# Altium PCB Layout.PcbDoc
Units mm, origin at the board's own origin, x right, y up, seen from the top; angles counter-clockwise.
Board outline 100 x 100 mm, 4 copper layers (Top Layer, Ground Layer, Power Layer, Bottom Layer), stack 1.591 mm thick; 122 components, 67 nets, 405 pads, 0 vias.
Unrouted connection lines stored in the file: 308.
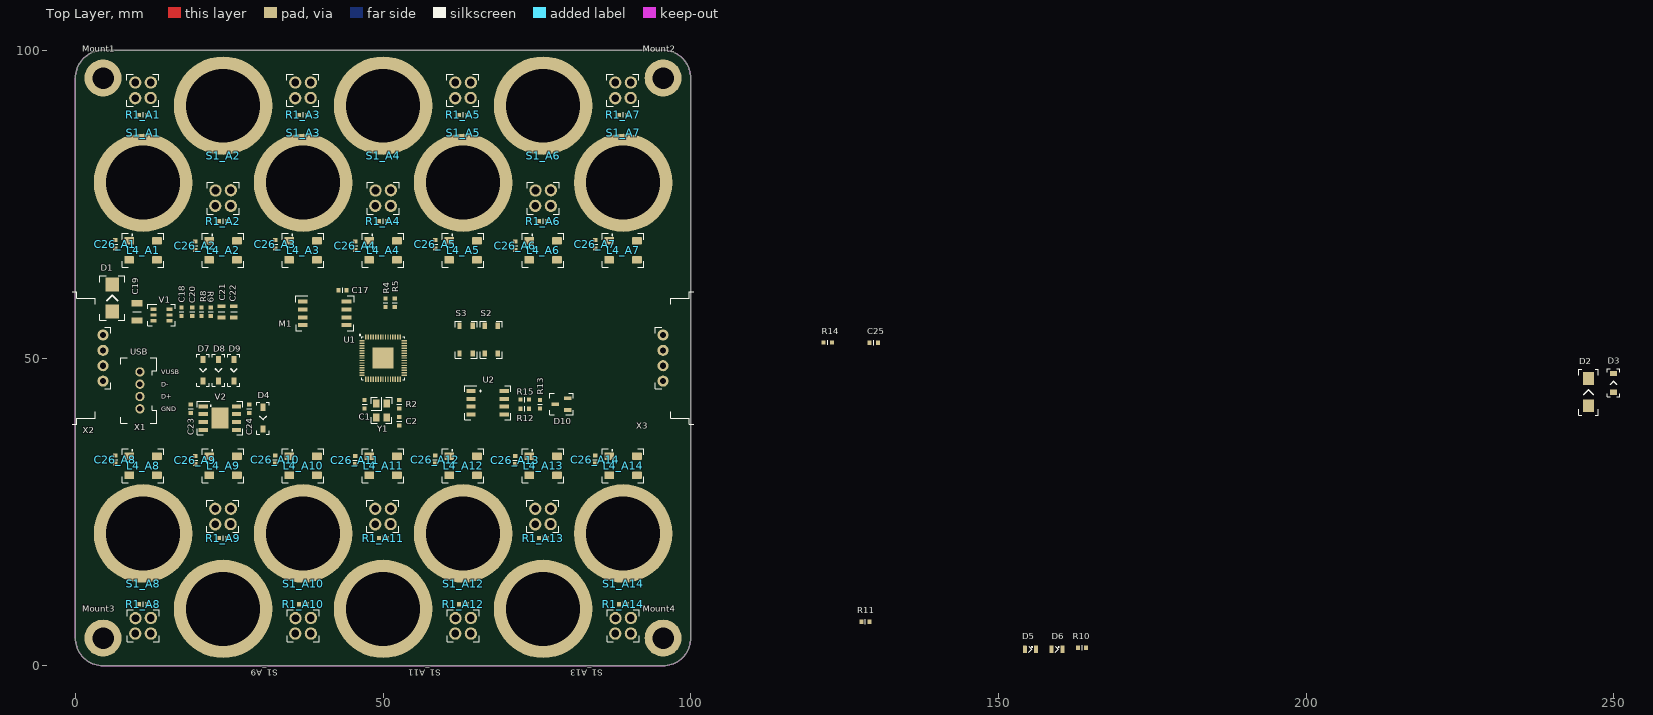
[diagram p0: Top Layer view]
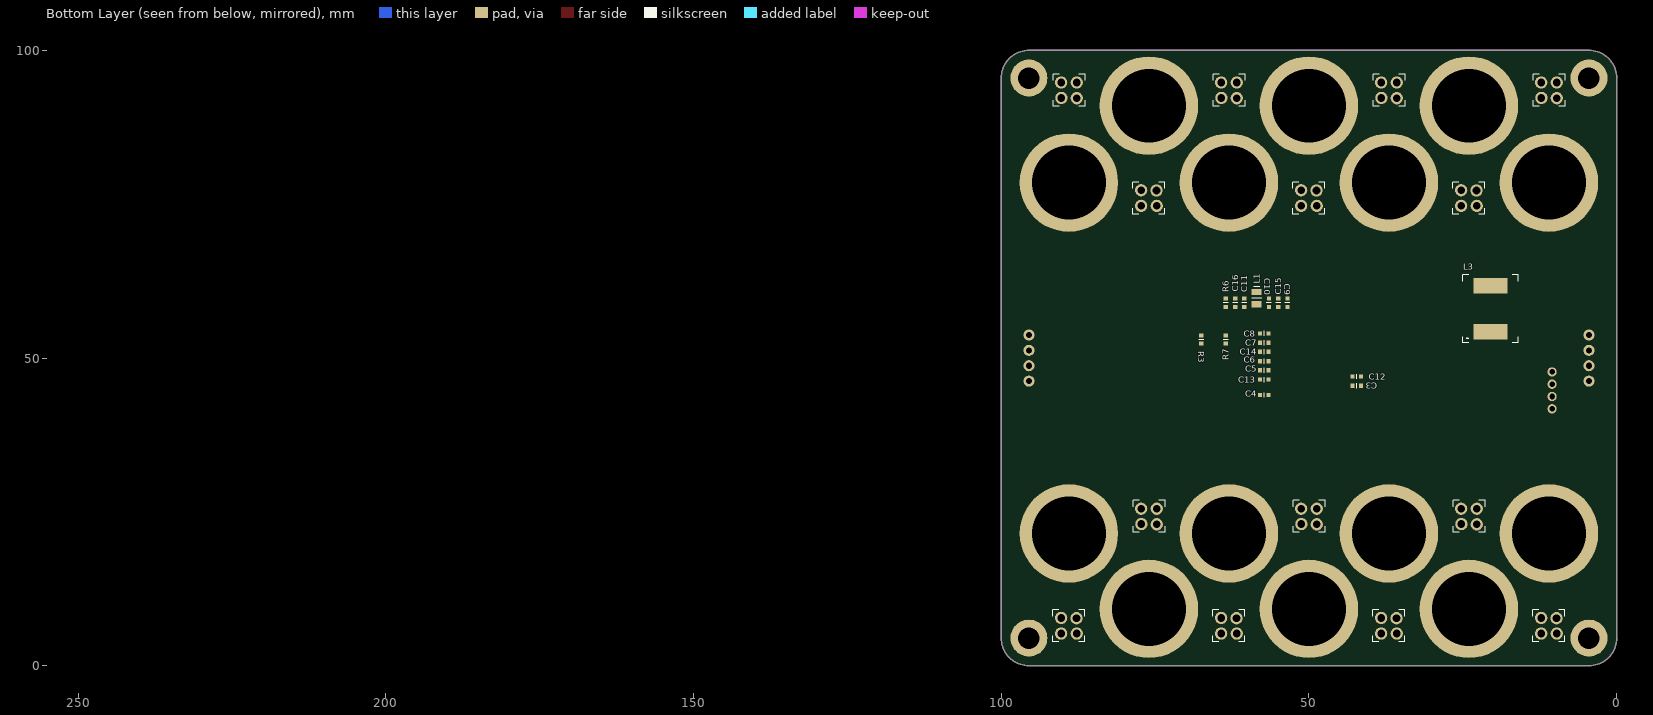
[diagram p1: Bottom Layer view, seen from below]

## Layer stack, top to bottom
Top Solder: solder mask 0.0102, Solder Resist, Dk 3.8
Top Layer: signal copper 0.035
Dielectric 2: prepreg 0.2104, 7628*1, Dk 4.4
Ground Layer: signal copper 0.0175
Dielectric 1: dielectric 1.065, FR-4, Dk 4.8
Power Layer: signal copper 0.0175
Dielectric 3: prepreg 0.2104, 7628*1, Dk 4.4
Bottom Layer: signal copper 0.035
Bottom Solder: solder mask 0.0102, Solder Resist, Dk 3.8

## Board outline
0,4.5 0,95.5 cw(c4.5,95.5) 4.5,100 95.5,100 cw(c95.5,95.5) 100,95.5 100,4.5 cw(c95.5,4.5) 95.5,0 4.5,0 cw(c4.5,4.5)

## Design rules (kind name [scope] priority, off if disabled: settings)
BoardOutlineClearance [All] p1: gap=0.2 ignorepadtopadclearanceinfootprint=FALSE
Clearance "inPolygon Clearance" [InPolygon] p1: gap=0.3 ignorepadtopadclearanceinfootprint=TRUE // this rule ensures that every net within a polygon of a different net has a set clearance from the poly
Clearance "High Current Polygon Clearance" [(InPolygon AND InNetClass('High_Current_Nets'))] p2: gap=0 ignorepadtopadclearanceinfootprint=TRUE // this rule ensures that every net within a polygon of a different net has a set clearance from the poly
Clearance "Different Diff Pair" [All] p3: gap=0.2 ignorepadtopadclearanceinfootprint=TRUE
Clearance "Same Diff Pair" [All] p4: gap=0.1 ignorepadtopadclearanceinfootprint=TRUE
Clearance "Different Nets" [not InAnyDifferentialPair] p5: gap=0.3 ignorepadtopadclearanceinfootprint=TRUE except(0.1: Arc-SMDPad Arc-THPad Arc-Via Arc-Text Track-SMDPad Track-THPad Track-Via Track-Text SMDPad-Text THPad-Text Via-Text Fill-Text Poly-Text Region-Text Text-Text; 0.12: Arc-Arc Arc-Track Track-Track; 0.15: SMDPad-SMDPad SMDPad-THPad SMDPad-Via THPad-THPad THPad-Via Via-Via; 0.2: Arc-Hole Track-Hole SMDPad-Hole THPad-Hole Via-Hole Fill-Hole Poly-Hole Region-Hole Text-Hole)
Clearance "Same Net" [not InAnyDifferentialPair] p6: gap=0 ignorepadtopadclearanceinfootprint=TRUE except(0.1: THPad-Via; 0.18: Arc-Arc Arc-Track Track-Track)
ComponentClearance [All] p1: gap=0.102 collisioncheckmode=3 verticalgap=0.102 showdistances=TRUE
DiffPairsRouting "Ethernet Routing" [InDifferentialPairClass('Ethernet_Pairs')] p1: maxlimit=0.25 minlimit=0.2 mostfreqgap=0.25 toplayer_maxgap=0.2 toplayer_prefgap=0.2 toplayer_minwidth=0.25 toplayer_maxwidth=0.25 toplayer_prefwidth=0.25 midlayer1_mingap=0.25 midlayer1_minwidth=0.19 midlayer1_maxwidth=0.19 midlayer1_prefwidth=0.19 midlayer2_mingap=0.25 midlayer2_minwidth=0.19 midlayer2_maxwidth=0.19 midlayer2_prefwidth=0.19 bottomlayer_maxgap=0.2 bottomlayer_prefgap=0.2 bottomlayer_minwidth=0.25 bottomlayer_maxwidth=0.25 bottomlayer_prefwidth=0.25 impedanceprofiledriven=TRUE maxuncoupledlength=12.7
DiffPairsRouting "USB Routing" [InDifferentialPairClass('USB_Pairs')] p2: maxlimit=0.291 minlimit=0.127 mostfreqgap=0.291 toplayer_maxgap=0.127 toplayer_prefgap=0.127 toplayer_minwidth=0.23 toplayer_maxwidth=0.23 toplayer_prefwidth=0.23 midlayer1_mingap=0.291 midlayer1_minwidth=0.25 midlayer1_maxwidth=0.25 midlayer1_prefwidth=0.25 midlayer2_mingap=0.291 midlayer2_minwidth=0.25 midlayer2_maxwidth=0.25 midlayer2_prefwidth=0.25 bottomlayer_maxgap=0.127 bottomlayer_prefgap=0.127 bottomlayer_minwidth=0.23 bottomlayer_maxwidth=0.23 bottomlayer_prefwidth=0.23 maxuncoupledlength=12.7
DiffPairsRouting "CAN Routing" [InDifferentialPairClass('CAN_Pairs')] p3: maxlimit=0.907 minlimit=0.5 mostfreqgap=0.907 toplayer_maxgap=0.5 toplayer_prefgap=0.5 toplayer_minwidth=0.201 toplayer_maxwidth=0.201 toplayer_prefwidth=0.201 midlayer1_mingap=0.907 midlayer1_minwidth=0.155 midlayer1_maxwidth=0.155 midlayer1_prefwidth=0.155 midlayer2_mingap=0.907 midlayer2_minwidth=0.155 midlayer2_maxwidth=0.155 midlayer2_prefwidth=0.155 bottomlayer_maxgap=0.5 bottomlayer_prefgap=0.5 bottomlayer_minwidth=0.201 bottomlayer_maxwidth=0.201 bottomlayer_prefwidth=0.201 maxuncoupledlength=12.7
DiffPairsRouting "RS485 Routing" [InDifferentialPairClass('RS485_Pairs')] p4: maxlimit=1.376 minlimit=0.127 mostfreqgap=1.376 toplayer_maxgap=0.127 toplayer_prefgap=0.127 toplayer_minwidth=0.1 toplayer_maxwidth=0.1 toplayer_prefwidth=0.1 midlayer1_mingap=1.376 midlayer1_minwidth=0.1 midlayer1_maxwidth=0.1 midlayer1_prefwidth=0.1 midlayer2_mingap=1.376 midlayer2_minwidth=0.1 midlayer2_maxwidth=0.1 midlayer2_prefwidth=0.1 bottomlayer_maxgap=0.127 bottomlayer_prefgap=0.127 bottomlayer_minwidth=0.1 bottomlayer_maxwidth=0.1 bottomlayer_prefwidth=0.1 impedanceprofiledriven=TRUE impedanceprofileid={28283980-AAE0-49A4-94E4-57724D17D13D} impedanceprofilevalue=120.000000 maxuncoupledlength=12.7
Height [All] p1: minheight=0 maxheight=1816.048 prefheight=12.7
HoleSize [All] p1: absolutevalues=TRUE maxlimit=6.3 minlimit=0.3 maxpercent=80.000 minpercent=20.000
HoleToHoleClearance [All] p1: gap=0.25 allowstackedmicrovias=FALSE
MatchedLengths "XTAL Nets Matched Delays" [InNetClass('XTAL_Nets')] p1: tolerance=25.4 checknetsindiffpair=FALSE checkdiffpairvsdiffpair=TRUE checkxsignals=TRUE checkothers=TRUE usedelayunits=TRUE delaytolerance=10.000000
MatchedLengths "Diff Pair Matched Delays" [InDifferentialPairClass('Ethernet_Pairs') or InDifferentialPairClass('USB_Pairs') or InDifferentialPairClass('CAN_Pairs')] p2: tolerance=5 checknetsindiffpair=TRUE checkdiffpairvsdiffpair=FALSE checkxsignals=FALSE checkothers=FALSE usedelayunits=TRUE delaytolerance=100.000000 phasematching=TRUE phasedelaytolerance=5.000000 phasedistance=12.7
MinimumAnnularRing [All] p1: minimumring=0.2
MinimumSolderMaskSliver [All] p1: minsoldermaskwidth=0
PlaneClearance "Supply Net Clearance" [InNetClass('Supply_Nets')] p1: clearance=0.5
PlaneClearance "All Nets" [All] p2: clearance=0.3
PolygonConnect "High Current" [InNetClass('High_Current_Nets')] p1: thpad.connectstyle=Relief thpad.reliefconductorwidth=0.4 thpad.reliefentries=4 thpad.polygonreliefangle="90 Angle" thpad.airgapwidth=0.1 thpad.conductorbypadedge=TRUE thpad.mindistance=0.381 thpad.enablemindistance=FALSE smdpad.connectstyle=Direct smdpad.reliefconductorwidth=0.254 smdpad.reliefentries=4 smdpad.polygonreliefangle="90 Angle" smdpad.airgapwidth=0.254 via.connectstyle=Direct via.reliefconductorwidth=0.254 via.reliefentries=4 via.polygonreliefangle="90 Angle" via.airgapwidth=0.254
PolygonConnect "Supply Nets" [InNetClass('Supply_Nets') OR InNetClass('Supply_Net')] p2: connectstyle=Relief reliefconductorwidth=0.3 reliefentries=4 polygonreliefangle="90 Angle" conductorbypadedge=TRUE mindistance=0.381 enablemindistance=FALSE airgapwidth=0.254
PolygonConnect General [All] p3: connectstyle=Relief reliefconductorwidth=0.254 reliefentries=4 polygonreliefangle="90 Angle" airgapwidth=0.254
RoomDefinition A11 [InComponentClass('A11')] p1: confinementstyle=ConfineIn formatcopy=TRUE lockcomponents=FALSE outline 40.848,0.098 40.848,30.403 44.748,30.403 44.748,34.802 46.398,34.802 46.398,35.452 53.602,35.452 53.602,30.403 59.152,30.403 59.152,0.098
RoomDefinition A9 [InComponentClass('A9')] p2: confinementstyle=ConfineIn formatcopy=TRUE lockcomponents=FALSE outline 14.848,0.098 14.848,30.403 18.748,30.403 18.748,34.802 20.398,34.802 20.398,35.452 27.602,35.452 27.602,30.403 33.152,30.403 33.152,0.098
RoomDefinition A10 [InComponentClass('A10')] p3: confinementstyle=ConfineIn formatcopy=TRUE lockcomponents=FALSE outline 27.848,0.347 27.848,30.652 31.748,30.652 31.748,34.877 33.398,34.877 33.398,35.452 40.602,35.452 40.602,30.652 46.152,30.652 46.152,0.347
RoomDefinition A14 [InComponentClass('A14')] p4: confinementstyle=ConfineIn formatcopy=TRUE lockcomponents=FALSE outline 79.848,0.347 79.848,30.652 83.748,30.652 83.748,34.877 85.398,34.877 85.398,35.452 92.602,35.452 92.602,30.652 98.152,30.652 98.152,0.347
RoomDefinition A13 [InComponentClass('A13')] p5: confinementstyle=ConfineIn formatcopy=TRUE lockcomponents=FALSE outline 66.848,0.098 66.848,30.403 70.748,30.403 70.748,34.802 72.398,34.802 72.398,35.452 79.602,35.452 79.602,30.403 85.152,30.403 85.152,0.098
RoomDefinition A12 [InComponentClass('A12')] p6: confinementstyle=ConfineIn formatcopy=TRUE lockcomponents=FALSE outline 53.848,0.347 53.848,30.652 57.748,30.652 57.748,34.877 59.398,34.877 59.398,35.452 66.602,35.452 66.602,30.652 72.152,30.652 72.152,0.347
RoomDefinition A8 [InComponentClass('A8')] p7: confinementstyle=ConfineIn formatcopy=TRUE lockcomponents=FALSE outline 1.848,0.347 1.848,30.652 5.748,30.652 5.748,34.877 7.398,34.877 7.398,35.452 14.602,35.452 14.602,30.652 20.152,30.652 20.152,0.347
RoomDefinition A7 [InComponentClass('A7')] p8: confinementstyle=ConfineIn formatcopy=TRUE lockcomponents=FALSE outline 79.848,69.348 79.848,99.653 98.152,99.653 98.152,69.348 92.602,69.348 92.602,64.548 85.398,64.548 85.398,67.123 83.748,67.123 83.748,69.348
RoomDefinition A6 [InComponentClass('A6')] p9: confinementstyle=ConfineIn formatcopy=TRUE lockcomponents=FALSE outline 66.848,69.847 66.848,100.152 85.152,100.152 85.152,69.847 79.602,69.847 79.602,64.548 72.398,64.548 72.398,66.873 70.748,66.873 70.748,69.847
RoomDefinition A5 [InComponentClass('A5')] p10: confinementstyle=ConfineIn formatcopy=TRUE lockcomponents=FALSE outline 53.848,69.348 53.848,99.653 72.152,99.653 72.152,69.348 66.602,69.348 66.602,64.548 59.398,64.548 59.398,67.123 57.748,67.123 57.748,69.348
RoomDefinition A4 [InComponentClass('A4')] p11: confinementstyle=ConfineIn formatcopy=TRUE lockcomponents=FALSE outline 40.848,69.847 40.848,100.152 59.152,100.152 59.152,69.847 53.602,69.847 53.602,64.548 46.398,64.548 46.398,66.873 44.748,66.873 44.748,69.847
RoomDefinition A3 [InComponentClass('A3')] p12: confinementstyle=ConfineIn formatcopy=TRUE lockcomponents=FALSE outline 27.848,69.348 27.848,99.653 46.152,99.653 46.152,69.348 40.602,69.348 40.602,64.548 33.398,64.548 33.398,67.123 31.748,67.123 31.748,69.348
RoomDefinition A2 [InComponentClass('A2')] p13: confinementstyle=ConfineIn formatcopy=TRUE lockcomponents=FALSE outline 14.848,69.847 14.848,100.152 33.152,100.152 33.152,69.847 27.602,69.847 27.602,64.548 20.398,64.548 20.398,66.873 18.748,66.873 18.748,69.847
RoomDefinition A1 [InComponentClass('A1')] p14: confinementstyle=ConfineIn formatcopy=TRUE lockcomponents=FALSE outline 1.848,69.348 1.848,99.653 20.152,99.653 20.152,69.348 14.602,69.348 14.602,64.548 7.398,64.548 7.398,67.123 5.748,67.123 5.748,69.348
RoutingVias [All] p1: holewidth=0.2 width=0.35 viastyle="Through Hole" minholewidth=0.15 minwidth=0.3 maxholewidth=6.3 maxwidth=6.55
SilkToSilkClearance [All] p1: silktosilkclearance=0
SilkToSolderMaskClearance [All] p1: minsilkscreentomaskgap=0 clearancetoexposedcopper=TRUE
SolderMaskExpansion [All] p1: expansion=0.075 istentingtop=FALSE
SupplyNets "Schematic Supply Nets_7" [InNet('+1V1')] p1: voltage=0.000
SupplyNets "Schematic Supply Nets_6" [InNet('+3V3')] p2: voltage=0.000
SupplyNets "Schematic Supply Nets_5" [InNet('+5V_USB')] p3: voltage=0.000
SupplyNets "Schematic Supply Nets_2" [InNet('+24V')] p4: voltage=0.000
SupplyNets "Schematic Supply Nets_1" [InNet('+5V-ORed')] p5: voltage=0.000
SupplyNets "Schematic Supply Nets" [InNet('+5V')] p6: voltage=0.000
SupplyNets "Schematic Supply Nets_3" [InNet('GND')] p7: voltage=0.000
UnRoutedNet [All] p1: checkbadconnections=TRUE
Width "nRF Width" [InNetClass('nRF Signal')] p1: maxlimit=0.379 minlimit=0.263 preferedwidth=0.379 toplayer_minwidth=0.379 midlayer1_maxwidth=0.263 midlayer1_prefwidth=0.263 midlayer2_maxwidth=0.263 midlayer2_prefwidth=0.263 bottomlayer_minwidth=0.379 minimp=50.000000 maximp=50.000000 favimp=50.000000 checkconnectedcopper=TRUE
Width [All] p2: maxlimit=100 minlimit=0.1 preferedwidth=0.2
20 further rules are at their usual default settings.

## Classes and differential pairs
differential pair class RS485_Pairs: RS485
component class "Top Level": Mount1 Mount2 Mount3 Mount4
component class A14: C26_A14 L4_A14 R1_A14 S1_A14
component class A13: C26_A13 L4_A13 R1_A13 S1_A13
component class A12: C26_A12 L4_A12 R1_A12 S1_A12
component class A11: C26_A11 L4_A11 R1_A11 S1_A11
component class A10: C26_A10 L4_A10 R1_A10 S1_A10
component class A9: C26_A9 L4_A9 R1_A9 S1_A9
component class A8: C26_A8 L4_A8 R1_A8 S1_A8
component class A7: C26_A7 L4_A7 R1_A7 S1_A7
component class A6: C26_A6 L4_A6 R1_A6 S1_A6
component class A5: C26_A5 L4_A5 R1_A5 S1_A5
component class A4: C26_A4 L4_A4 R1_A4 S1_A4
component class A3: C26_A3 L4_A3 R1_A3 S1_A3
component class A2: C26_A2 L4_A2 R1_A2 S1_A2
component class A1: C26_A1 L4_A1 R1_A1 S1_A1
differential pair class USB_Pairs: RP2350_D RP2350_DX
channel class "2mL Socket": A1 A2 A3 A4 A5 A6 A7 A8 A9 A10 A11 A12 A13 A14
net class XTAL_Nets: XIN XOUT
net class SW[1..14]: SW1 SW2 SW3 SW4 SW5 SW6 SW7 SW8 SW9 SW10 SW11 SW12 SW13 SW14
net class Supply_Nets: +5V +5V-ORed +5V_USB GND
component class "U_RS-485 Interface": C25 D10 R12 R13 R14 R15 U2
component class U_Power: C18 C19 C20 C21 C22 C23 C24 D1 D2 D3 D4 D5 D6 D7 D8 D9 L3 R8 R9 R10 R11 V1 V2
component class U_Microprocessor: C1 C2 C3 C4 C5 C6 C7 C8 C9 C10 C11 C12 C13 C14 C15 C16 C17 L1 M1 R2 R3 R4 R5 R6 R7 S2 S3 U1 Y1
component class U_Connectors: X1 X2 X3
differential pair RS485_X: +RS485_X_P -RS485_X_N
differential pair RS485: +RS485_P -RS485_N
differential pair RP2350_DX: +RP2350_DX_P -RP2350_DX_N
differential pair RP2350_D: +RP2350_D_P -RP2350_D_N

## Components (designator, comment, footprint, x,y, rotation, side; value= is the part's Value field where it differs from the comment)
C1 "[Cap] 0603 15pF 1% 100V" "[Cap] SMD 0603" 47,42.5 r90 top
C2 "[Cap] 0603 15pF 1% 100V" "[Cap] SMD 0603" 52.65,39.75 r90 top
C3 "[Cap] 0603 0.1uF 10% 50V" "[Cap] SMD 0603" 42.25,45.5 r0 bottom
C4 "[Cap] 0603 0.1uF 10% 50V" "[Cap] SMD 0603" 57.25,44 r180 bottom
C5 "[Cap] 0603 0.1uF 10% 50V" "[Cap] SMD 0603" 57.25,48 r180 bottom
C6 "[Cap] 0603 0.1uF 10% 50V" "[Cap] SMD 0603" 57.25,49.5 r180 bottom
C7 "[Cap] 0603 0.1uF 10% 50V" "[Cap] SMD 0603" 57.25,52.5 r180 bottom
C8 "[Cap] 0603 0.1uF 10% 50V" "[Cap] SMD 0603" 57.25,54 r180 bottom
C9 "[Cap] 0603 0.1uF 10% 50V" "[Cap] SMD 0603" 53.5,59 r270 bottom
C10 "[Cap] 0603 0.1uF 10% 50V" "[Cap] SMD 0603" 56.5,59 r270 bottom
C11 "[Cap] 0603 4.7uF 10% 25V" "[Cap] SMD 0603" 60.5,59 r270 bottom
C12 "[Cap] 0603 0.1uF 10% 50V" "[Cap] SMD 0603" 42.25,47 r0 bottom
C13 "[Cap] 0603 0.1uF 10% 50V" "[Cap] SMD 0603" 57.25,46.5 r180 bottom
C14 "[Cap] 0603 4.7uF 10% 25V" "[Cap] SMD 0603" 57.25,51 r180 bottom
C15 "[Cap] 0603 4.7uF 10% 25V" "[Cap] SMD 0603" 55,59 r90 bottom
C16 "[Cap] 0603 4.7uF 10% 25V" "[Cap] SMD 0603" 62,59 r90 bottom
C17 "[Cap] 0603 0.1uF 10% 50V" "[Cap] SMD 0603" 43.425,61 r0 top
C18 "[Cap] 0603 0.1uF 10% 50V" "[Cap] SMD 0603" 17.25,57.5 r90 top
C19 "[Cap] 1206 10uF 20% 50V" "[Cap] SMD 1206" 10,57.5 r270 top
C20 "[Cap] 0603 47pF 5% 50V" "[Cap] SMD 0603" 19,57.5 r90 top
C21 "[Cap] 0805 22uF 20% 25V" "[Cap] SMD 0805" 23.75,57.5 r90 top
C22 "[Cap] 0805 22uF 20% 25V" "[Cap] SMD 0805" 25.75,57.5 r90 top
C23 "[Cap] 0603 10uF 20% 16V" "[Cap] SMD 0603" 18.75,41.75 r270 top
C24 "[Cap] 0603 10uF 20% 16V" "[Cap] SMD 0603" 28.25,41.75 r270 top
C25 "[Cap] 0603 0.1uF 10% 50V" "[Cap] SMD 0603" 129.75,52.5 r0 top
C26_A1 "[Cap] 0603 0.1uF 10% 50V" "[Cap] SMD 0603" 6.5,68.5 r270 top (schematic designator C26)
C26_A2 "[Cap] 0603 0.1uF 10% 50V" "[Cap] SMD 0603" 19.5,68.25 r270 top (schematic designator C26)
C26_A3 "[Cap] 0603 0.1uF 10% 50V" "[Cap] SMD 0603" 32.5,68.5 r270 top (schematic designator C26)
C26_A4 "[Cap] 0603 0.1uF 10% 50V" "[Cap] SMD 0603" 45.5,68.25 r270 top (schematic designator C26)
C26_A5 "[Cap] 0603 0.1uF 10% 50V" "[Cap] SMD 0603" 58.5,68.5 r270 top (schematic designator C26)
C26_A6 "[Cap] 0603 0.1uF 10% 50V" "[Cap] SMD 0603" 71.5,68.25 r270 top (schematic designator C26)
C26_A7 "[Cap] 0603 0.1uF 10% 50V" "[Cap] SMD 0603" 84.5,68.5 r270 top (schematic designator C26)
C26_A8 "[Cap] 0603 0.1uF 10% 50V" "[Cap] SMD 0603" 6.5,33.5 r270 top (schematic designator C26)
C26_A9 "[Cap] 0603 0.1uF 10% 50V" "[Cap] SMD 0603" 19.5,33.425 r270 top (schematic designator C26)
C26_A10 "[Cap] 0603 0.1uF 10% 50V" "[Cap] SMD 0603" 32.5,33.5 r270 top (schematic designator C26)
C26_A11 "[Cap] 0603 0.1uF 10% 50V" "[Cap] SMD 0603" 45.5,33.425 r270 top (schematic designator C26)
C26_A12 "[Cap] 0603 0.1uF 10% 50V" "[Cap] SMD 0603" 58.5,33.5 r270 top (schematic designator C26)
C26_A13 "[Cap] 0603 0.1uF 10% 50V" "[Cap] SMD 0603" 71.5,33.425 r270 top (schematic designator C26)
C26_A14 "[Cap] 0603 0.1uF 10% 50V" "[Cap] SMD 0603" 84.5,33.5 r270 top (schematic designator C26)
D1 "DO-214AA" "[Diode] SMD DO-214AA" 6,59.75 r90 top
D2 "DO-214AC" "[Diode] SMD DO-214AC" 245.872,44.45 r90 top
D3 "SOD-123F" "[Diode] SOD-123F" 249.936,45.974 r90 top
D4 "SOD123" "[Diode] SMD SOD-123" 30.5,40.25 r270 top
D5 "[LED] SMD 0805 Green" "[LED] SMD 0805" 155.194,2.667 r0 top
D6 "[LED] SMD 0805 Green" "[LED] SMD 0805" 159.512,2.667 r0 top
D7 "SOD123" "[Diode] SMD SOD-123" 20.75,48 r270 top
D8 "SOD123" "[Diode] SMD SOD-123" 23.25,48 r270 top
D9 "SOD-123" "[Diode] SMD SOD-123" 25.75,48 r270 top
D10 "SOD-23" "[Diode] SOD-23" 79,42.5 r180 top
L1 "[3.3uH] SMD 0806 2.1A" "[Inductor] SMD 0806" 58.5,59.75 r270 bottom
L3 "[6.8uH] SMD Nonstandard 6.9A" "[6.8uH] SMD Nonstandard 6.9A" 20.5,58 r90 bottom
L4_A1 "[Neopixel] Single LED" "[Neopixel] Single LED" 11,67.5 r0 top (schematic designator L4)
L4_A2 "[Neopixel] Single LED" "[Neopixel] Single LED" 24,67.5 r0 top (schematic designator L4)
L4_A3 "[Neopixel] Single LED" "[Neopixel] Single LED" 37,67.5 r0 top (schematic designator L4)
L4_A4 "[Neopixel] Single LED" "[Neopixel] Single LED" 50,67.5 r0 top (schematic designator L4)
L4_A5 "[Neopixel] Single LED" "[Neopixel] Single LED" 63,67.5 r0 top (schematic designator L4)
L4_A6 "[Neopixel] Single LED" "[Neopixel] Single LED" 76,67.5 r0 top (schematic designator L4)
L4_A7 "[Neopixel] Single LED" "[Neopixel] Single LED" 89,67.5 r0 top (schematic designator L4)
L4_A8 "[Neopixel] Single LED" "[Neopixel] Single LED" 11,32.5 r0 top (schematic designator L4)
L4_A9 "[Neopixel] Single LED" "[Neopixel] Single LED" 24,32.5 r0 top (schematic designator L4)
L4_A10 "[Neopixel] Single LED" "[Neopixel] Single LED" 37,32.5 r0 top (schematic designator L4)
L4_A11 "[Neopixel] Single LED" "[Neopixel] Single LED" 50,32.5 r0 top (schematic designator L4)
L4_A12 "[Neopixel] Single LED" "[Neopixel] Single LED" 63,32.5 r0 top (schematic designator L4)
L4_A13 "[Neopixel] Single LED" "[Neopixel] Single LED" 76,32.5 r0 top (schematic designator L4)
L4_A14 "[Neopixel] Single LED" "[Neopixel] Single LED" 89,32.5 r0 top (schematic designator L4)
M1 "W25Q128JVSIM" "[Flash] 128MBit" 40.5,57.25 r0 top
Mount1 "M3 Mount Hole" "[Mount] M3 Mount Hole" 4.5,95.5 r0 top
Mount2 "M3 Mount Hole" "[Mount] M3 Mount Hole" 95.5,95.5 r0 top
Mount3 "M3 Mount Hole" "[Mount] M3 Mount Hole" 4.5,4.5 r0 top
Mount4 "M3 Mount Hole" "[Mount] M3 Mount Hole" 95.5,4.5 r0 top
R1_A1 "[1k] SMD 0603 1% 1/10W" "[Res] SMD 0603" 11,89.5 r0 top (schematic designator R1)
R1_A2 "[1k] SMD 0603 1% 1/10W" "[Res] SMD 0603" 24,72.25 r180 top (schematic designator R1)
R1_A3 "[1k] SMD 0603 1% 1/10W" "[Res] SMD 0603" 37,89.5 r0 top (schematic designator R1)
R1_A4 "[1k] SMD 0603 1% 1/10W" "[Res] SMD 0603" 50,72.25 r180 top (schematic designator R1)
R1_A5 "[1k] SMD 0603 1% 1/10W" "[Res] SMD 0603" 63,89.5 r0 top (schematic designator R1)
R1_A6 "[1k] SMD 0603 1% 1/10W" "[Res] SMD 0603" 76,72.25 r180 top (schematic designator R1)
R1_A7 "[1k] SMD 0603 1% 1/10W" "[Res] SMD 0603" 89,89.5 r0 top (schematic designator R1)
R1_A8 "[1k] SMD 0603 1% 1/10W" "[Res] SMD 0603" 11,10 r180 top (schematic designator R1)
R1_A9 "[1k] SMD 0603 1% 1/10W" "[Res] SMD 0603" 24,20.75 r0 top (schematic designator R1)
R1_A10 "[1k] SMD 0603 1% 1/10W" "[Res] SMD 0603" 37,10 r180 top (schematic designator R1)
R1_A11 "[1k] SMD 0603 1% 1/10W" "[Res] SMD 0603" 50,20.75 r0 top (schematic designator R1)
R1_A12 "[1k] SMD 0603 1% 1/10W" "[Res] SMD 0603" 63,10 r180 top (schematic designator R1)
R1_A13 "[1k] SMD 0603 1% 1/10W" "[Res] SMD 0603" 76,20.75 r0 top (schematic designator R1)
R1_A14 "[1k] SMD 0603 1% 1/10W" "[Res] SMD 0603" 89,10 r180 top (schematic designator R1)
R2 "[1k] SMD 0603 1% 1/10W" "[Res] SMD 0603" 52.65,42.5 r90 top
R3 "[1k] SMD 0603 1% 1/10W" "[Res] SMD 0603" 67.5,53 r270 bottom
R4 "[27] SMD 0603 1% 1/10W" "[Res] SMD 0603" 50.4,59 r270 top
R5 "[27] SMD 0603 1% 1/10W" "[Res] SMD 0603" 51.9,59 r270 top
R6 "[33] SMD 0603 0.5% 1/16W" "[Res] SMD 0603" 63.5,59 r270 bottom
R7 "[1k] SMD 0603 1% 1/10W" "[Res] SMD 0603" 63.5,53 r90 bottom
R8 "[158k] SMD 0603 1% 1/10W" "[Res] SMD 0603" 20.5,57.5 r90 top
R9 "[30.1k] SMD 0603 1% 1/10W" "[Res] SMD 0603" 22,57.5 r270 top
R10 "[1.5k] SMD 0603 1% 1/10W" "[Res] SMD 0603" 163.576,2.921 r0 top
R11 "[220] SMD 0603 5% 1/10W" "[Res] SMD 0603" 128.386,7.171 r0 top
R12 "[10] SMD 0603 5% 1/10W" "[Res] SMD 0603" 73,41.75 r180 top
R13 "[120] SMD 0603 1% 1/10W" "[Res] SMD 0603" 75.5,42.5 r270 top
R14 "[10k] SMD 0603 1% 1/10W" "[Res] SMD 0603" 122.259,52.523 r0 top
R15 "[10] SMD 0603 5% 1/10W" "[Res] SMD 0603" 73,43.25 r180 top
S1_A1 "[Tube] 2mL Tube w/ Switch Assembly" "[Tube] 2mL Tube w/ Switch Assembly" 11,93.5 r270 top (schematic designator S1)
S1_A2 "[Tube] 2mL Tube w/ Switch Assembly" "[Tube] 2mL Tube w/ Switch Assembly" 24,76 r90 top (schematic designator S1)
S1_A3 "[Tube] 2mL Tube w/ Switch Assembly" "[Tube] 2mL Tube w/ Switch Assembly" 37,93.5 r270 top (schematic designator S1)
S1_A4 "[Tube] 2mL Tube w/ Switch Assembly" "[Tube] 2mL Tube w/ Switch Assembly" 50,76 r90 top (schematic designator S1)
S1_A5 "[Tube] 2mL Tube w/ Switch Assembly" "[Tube] 2mL Tube w/ Switch Assembly" 63,93.5 r270 top (schematic designator S1)
S1_A6 "[Tube] 2mL Tube w/ Switch Assembly" "[Tube] 2mL Tube w/ Switch Assembly" 76,76 r90 top (schematic designator S1)
S1_A7 "[Tube] 2mL Tube w/ Switch Assembly" "[Tube] 2mL Tube w/ Switch Assembly" 89,93.5 r270 top (schematic designator S1)
S1_A8 "[Tube] 2mL Tube w/ Switch Assembly" "[Tube] 2mL Tube w/ Switch Assembly" 11,6.5 r90 top (schematic designator S1)
S1_A9 "[Tube] 2mL Tube w/ Switch Assembly" "[Tube] 2mL Tube w/ Switch Assembly" 24,24.25 r270 top (schematic designator S1)
S1_A10 "[Tube] 2mL Tube w/ Switch Assembly" "[Tube] 2mL Tube w/ Switch Assembly" 37,6.5 r90 top (schematic designator S1)
S1_A11 "[Tube] 2mL Tube w/ Switch Assembly" "[Tube] 2mL Tube w/ Switch Assembly" 50,24.25 r270 top (schematic designator S1)
S1_A12 "[Tube] 2mL Tube w/ Switch Assembly" "[Tube] 2mL Tube w/ Switch Assembly" 63,6.5 r90 top (schematic designator S1)
S1_A13 "[Tube] 2mL Tube w/ Switch Assembly" "[Tube] 2mL Tube w/ Switch Assembly" 76,24.25 r270 top (schematic designator S1)
S1_A14 "[Tube] 2mL Tube w/ Switch Assembly" "[Tube] 2mL Tube w/ Switch Assembly" 89,6.5 r90 top (schematic designator S1)
S2 "[SPST] SMD Pushbutton" "[SPST] SMD Pushbutton" 67.575,53 r90 top
S3 "[SPST] SMD Pushbutton" "[SPST] SMD Pushbutton" 63.5,53 r90 top
U1 "RP2350A" "[MCU] RP2350A" 50,50 r0 top
U2 "[Bridge] UART-RS485" 8-SOIC 67,42.75 r0 top
V1 "SOT-23" SOT-23 14,57 r0 top
V2 "3V3 1.5A" "[Linear] 3V3 1.5A" 23.5,40.25 r0 top
X1 "[Sherlock] 4pin" "[Sherlock] 4pin" 10.5,44.75 r270 top
X2 "Male" "[Pogo] Magnetic Right-Angle 4pos Male" 4.5,50 r270 top
X3 "Female" "[Pogo] Magnetic Right-Angle 4pos Female" 95.5,50 r90 top
Y1 "XTAL 12MHz" "[Crystal] SMD 12MHz" 49.75,41.5 r270 top

## Footprints (in the part's own frame and the unit in brackets; to place one, negate y for a bottom-side part, rotate by r counter-clockwise, add the part's x,y. Pads: shape width x height; smd on the part's side, far side on the other; paste and mask are expansions set on the pad)
8-SOIC [mm]
  rect 1.528x0.65 smd: 1(-2.711,1.905) 2(-2.711,0.635) 3(-2.711,-0.635) 4(-2.711,-1.905) 5(2.711,-1.905) 6(2.711,-0.635) 7(2.711,0.635) 8(2.711,1.905)
  silkscreen extent -3.75,-2.75 3.75,2.75, body extent -3.01,-2.45 3.01,2.45, height 1.63
"[6.8uH] SMD Nonstandard 6.9A" [mm]
  rect 2.5x5.5 smd: 1(-3.75,0) 2(3.75,0)
  silkscreen extent -5.5,-4.5 5.5,4.5, body extent -4.25,-4 4.25,4, height 4.09
"[Cap] SMD 0603" [mm]
  rect 0.65x0.7 smd: 1(-0.675,0) 2(0.675,0)
  silkscreen extent 0,-0.4 0,0.4, body extent -0.8,-0.45 0.8,0.45, height 0.8
"[Cap] SMD 0805" [mm]
  rect 0.6x1.25 smd: 1(-0.9,0) 2(0.9,0)
  silkscreen extent 0,-0.53 0,0.53, body extent -1,-0.63 1,0.63, height 1
"[Cap] SMD 1206" [mm]
  rect 1.02x1.82 smd: 1(-1.4,0) 2(1.4,0)
  silkscreen extent 0,-0.7 0,0.7, body extent -1.7,-0.9 1.7,0.9, height 1.8
"[Crystal] SMD 12MHz" [mm]
  rect 1.3x1.05 smd: 1(-1.15,-0.875) 2(1.15,-0.875) 3(1.15,0.875) 4(-1.15,0.875)
  silkscreen extent -2.1,-1.7 2.1,1.7, body extent -1.6,-1.25 1.6,1.25, height 0.75
"[Diode] SMD DO-214AA" [mm]
  rect 2.25x2.15 smd: 1(2.2,0) 2(-2.2,0)
  silkscreen extent -3.6,-2 3.6,2, body extent -2.68,-1.75 2.68,1.75, height 2.3
"[Diode] SMD DO-214AC" [mm]
  rect 2.1x1.8 smd: 1(2.2,0) 2(-2.2,0)
  silkscreen extent -3.75,-1.6 3.75,1.6, body extent -3.07,-1.33 3.07,1.33, height 2.39
"[Diode] SMD SOD-123" [mm]
  rect 1.15x0.8 smd: 1(1.75,0) 2(-1.75,0)
  silkscreen extent -2.6,-1 2.6,1, body extent -1.85,-0.8 1.86,0.8, height 1.35
"[Diode] SOD-23" [mm]
  rect 1.25x0.6 smd: 1(-1,0.95) 2(-1,-0.95) 3(1,0)
  silkscreen extent -1.9,-1.75 1.9,1.75, body extent -1.15,-1.45 1.15,1.45, height 1.17
"[Diode] SOD-123F" [mm]
  rect 0.85x1.2 smd: 1(1.525,0) 2(-1.525,0)
  silkscreen extent -2.25,-1 2.25,1, body extent -1.75,-0.8 1.75,0.8, height 0.8
"[Flash] 128MBit" [mm] "W25Q128JVSIM"
  rect 1.6x0.65 smd: 1(-3.55,1.905) 2(-3.55,0.635) 3(-3.55,-0.635) 4(-3.55,-1.905) 5(3.55,-1.905) 6(3.55,-0.635) 7(3.55,0.635) 8(3.55,1.905)
  silkscreen extent -4.7,-2.85 4.7,2.85, body extent -3.9,-2.61 3.9,2.62, height 1.95
"[Inductor] SMD 0806" [mm]
  rect 1x1.6 smd: 1(-1,0) 2(1,0)
  silkscreen extent -1.8,-0.8 0,0.8, body extent -1,-0.8 1,0.8, height 1
"[LED] SMD 0805" [mm]
  rrect20% 0.6x1.25 smd: 1(-0.9,0) 2(0.9,0)
  silkscreen extent -0.28,-0.51 0.37,0.51, body extent -1,-0.65 1,0.65, height 0.8
"[Linear] 3V3 1.5A" [mm]
  rect 1.525x0.65 smd: 1(-2.688,1.905) 2(-2.688,0.635) 3(-2.688,-0.635) 4(-2.688,-1.905) 5(2.688,-1.905) 6(2.688,-0.635) 7(2.688,0.635) 8(2.688,1.905)
  rect 2.71x3.35 smd: 9(0,0)
  silkscreen extent -3.7,-2.73 3.7,2.73, body extent -3,-2.45 3,2.45, height 1.5
"[MCU] RP2350A" [mm]
  rrect25% 0.83x0.22 smd: 1(-3.44,2.8) 2(-3.44,2.4) 3(-3.44,2) 4(-3.44,1.6) 5(-3.44,1.2) 6(-3.44,0.8) 7(-3.44,0.4) 8(-3.44,0) 9(-3.44,-0.4) 10(-3.44,-0.8) 11(-3.44,-1.2) 12(-3.44,-1.6) 13(-3.44,-2) 14(-3.44,-2.4) 15(-3.44,-2.8) 31(3.44,-2.8) 32(3.44,-2.4) 33(3.44,-2) 34(3.44,-1.6) 35(3.44,-1.2) 36(3.44,-0.8) 37(3.44,-0.4) 38(3.44,0) 39(3.44,0.4) 40(3.44,0.8) 41(3.44,1.2) 42(3.44,1.6) 43(3.44,2) 44(3.44,2.4) 45(3.44,2.8)
  rrect25% 0.22x0.83 smd: 16(-2.8,-3.44) 17(-2.4,-3.44) 18(-2,-3.44) 19(-1.6,-3.44) 20(-1.2,-3.44) 21(-0.8,-3.44) 22(-0.4,-3.44) 23(0,-3.44) 24(0.4,-3.44) 25(0.8,-3.44) 26(1.2,-3.44) 27(1.6,-3.44) 28(2,-3.44) 29(2.4,-3.44) 30(2.8,-3.44) 46(2.8,3.44) 47(2.4,3.44) 48(2,3.44) 49(1.6,3.44) 50(1.2,3.44) 51(0.8,3.44) 52(0.4,3.44) 53(0,3.44) 54(-0.4,3.44) 55(-0.8,3.44) 56(-1.2,3.44) 57(-1.6,3.44) 58(-2,3.44) 59(-2.4,3.44) 60(-2.8,3.44)
  rect 3.4x3.4 smd paste-4: 61(0,0)
  silkscreen extent -3.85,-3.5 3.5,3.85, body extent -3.55,-3.55 3.55,3.55, height 0.96
"[Mount] M3 Mount Hole" [mm]
  round 6 hole 3.5: 1(0,0)
"[Neopixel] Single LED" [mm] "WS2812B"
  rrect20% 1.6x1.2 smd: 1(-2.25,1.55) 2(-2.25,-1.55) 3(2.25,-1.55) 4(2.25,1.55)
  silkscreen extent -3.4,-2.75 3.4,2.75, body extent -2.68,-2.47 2.68,2.47, height 1.7
"[Pogo] Magnetic Right-Angle 4pos Female" [mm] "5358"
  round 1.8 hole 1: 1(-3.75,0) 2(-1.25,0) 3(1.25,0) 4(3.75,0)
  silkscreen extent -10.75,-4.99 10.75,1.25, body extent -10.49,-5.5 10.49,0.3, height 6
"[Pogo] Magnetic Right-Angle 4pos Male" [mm] "5358"
  round 1.8 hole 1: 1(3.75,0) 2(1.25,0) 3(-1.25,0) 4(-3.75,0)
  silkscreen extent -10.75,-4.99 10.75,1.25, body extent -10.49,-6.4 10.49,0.3, height 6
"[Res] SMD 0603" [mm]
  rect 0.65x0.7 smd: 1(-0.675,0) 2(0.675,0)
  silkscreen extent 0,-0.4 0,0.4, body extent -0.8,-0.45 0.8,0.45, height 0.8
"[Sherlock] 4pin" [mm] "0353620450"
  round 1.5 hole 0.9: 1(-3,0) 2(-1,0) 3(1,0) 4(3,0)
  silkscreen extent -5.26,-3.1 5.34,2.7, body extent -5.11,-3 5.19,2.55, height 8.5
"[SPST] SMD Pushbutton" [mm] "PTS815SJM250SMTRLFS"
  rect 1x0.7 smd: 1(-2.25,1.075) 1(2.25,1.075) 2(-2.25,-1.075) 2(2.25,-1.075)
  silkscreen extent -3.02,-1.82 3.02,1.8, body extent -2.25,-1.6 2.25,1.6, height 2.5
"[Tube] 2mL Tube w/ Switch Assembly" [mm]
  round 2 hole 1.25: 1(-1.27,-1.27) 1(1.27,-1.27) 2(-1.27,1.27) 3(1.23,1.23)
  round 16 hole 12: MH(15,0)
  silkscreen extent -2.62,-2.62 2.58,2.58, body extent -6.05,-6.5 21.48,6.5, height 13
SOT-23 [mm]
  rect 1.05x0.55 smd: 1(-1.3,0.95) 2(-1.3,0) 3(-1.3,-0.95) 4(1.3,-0.95) 5(1.3,0) 6(1.3,0.95)
  silkscreen extent -2.25,-1.75 2.25,1.75, body extent -1.4,-1.45 1.4,1.45, height 1

## Part data
C1 C2: "GCM1885C2A150FA16D", Capacitance=15pF, Max Voltage=100V, Size Package=0603, Supplier Part Number 1=490-16416-1-ND, Tolerance=1%, Supplier 1=DigiKey
C3 C4 C5 C6 C7 C8 C9 C10 C12 C13 C17 C18 C25 C26_A1 C26_A2 C26_A3 C26_A4 C26_A5 C26_A6 C26_A7 C26_A8 C26_A9 C26_A10 C26_A11 C26_A12 C26_A13 C26_A14: "CL10B104KB8NNNC", Capacitance=100nF, Max Voltage=50V, Size Package=0603, Supplier Part Number 1=1276-1000-6-ND, Tolerance=10%, Supplier 1=DigiKey
C11 C14 C15 C16: "GRM188R61E475KE11D", Capacitance=4.7uF, Max Voltage=25V, Size Package=0603, Supplier Part Number 1=490-7203-6-ND, Tolerance=10%, Supplier 1=DigiKey
C19: "CGA5L3X5R1H106M160AB", Capacitance=10uF, Max Voltage=50V, Size Package=1206, Supplier Part Number 1=445-12883-6-ND, Tolerance=10%, Supplier 1=DigiKey
C20: "CL10C470JB8NNNC", Capacitance=47pF, Max Voltage=50V, Size Package=0603, Supplier Part Number 1=1276-1037-6-ND, Tolerance=5%, Supplier 1=DigiKey
C21 C22: "CL21A226MAYNNWE", Capacitance=22uF, Max Voltage=25V, Size Package=0805, Supplier Part Number 1=1276-CL21A226MAYNNWECT-ND, Tolerance=20%, Supplier 1=DigiKey
C23 C24: "GRM188C81C106MA73D", Capacitance=10uF, Max Voltage=16V, Size Package=0603, Supplier Part Number 1=490-7198-1-ND, Tolerance=20%, Supplier 1=DigiKey
D1: library part "[TVS] SMBJ33CA", "SMBJ33CA", Optimal Zener Voltage=33V, Supplier Part Number 1=SMBJ33CA-FDICT-ND, Supplier 1=DigiKey, Wattage=600W
D2: library part "[Zener] SMD 5.6V 1W 5%", "SMAZ5V6-13-F", Optimal Zener Voltage=5.6V, Supplier Part Number 1=SMAZ5V6-FDICT-ND, Tolerance=5%, Supplier 1=DigiKey, Wattage=1W
D3: library part "[Zener] SMD 3.5V 1W 6%", "KDZVTR3.3B", Optimal Zener Voltage=3.5V, Supplier Part Number 1=846-KDZVTR3.3BCT-ND, Tolerance=6.06%, Supplier 1=DigiKey, Wattage=1W
D4 D7 D8: library part "[Schottky] SMD 40V 1A", "B5819W-TP", Supplier Part Number 1=B5819W-TPMSCT-ND, Supplier 1=DigiKey
D5 D6: "LG R971-KN-1-0-20-R18", Color=Green, Size Package=0805, Supplier Part Number 1=475-LGR971-KN-1CT-ND, Supplier 1=DigiKey
D9: library part "[Zener] SMD 5.6V 1/2W 5%", "CMHZ5232B TR PBFREE", Optimal Zener Voltage=5.6V, Supplier Part Number 1=1514-CMHZ5232BTRPBFREEDKR-ND, Tolerance=5%, Supplier 1=DigiKey, Wattage=500mW
D10: library part "[TVS] 7,12Vnom 11,19Vclamp_max", "CDSOT23-SM712", Optimal Zener Voltage="7V, 12V", Supplier Part Number 1=CDSOT23-SM712CT-ND, Supplier 1=DigiKey, Wattage=400W
L1: "AOTA-B201610S3R3-101-T", Inductance=3.3uH, Package=0806, Supplier Part Number 1=535-AOTA-B201610S3R3-101-TCT-ND, Supplier 1=DigiKey
L3: "ETQ-P4M6R8KVK", DC Resistance=25.85mOhm, Inductance=6.8uH, Package="8.50 x 8.00mm", Supplier Part Number 1=P19775CT-ND, Supplier 1=DigiKey
L4_A1 L4_A2 L4_A3 L4_A4 L4_A5 L4_A6 L4_A7 L4_A8 L4_A9 L4_A10 L4_A11 L4_A12 L4_A13 L4_A14: "WS2812B", Supplier Part Number 1=1568-16347CT-ND, Supplier 1=DigiKey
M1: library part "[Flash] 128MBit", Supplier Part Number 1=W25Q128JVSIM-ND, Supplier 1=DigiKey
Mount1 Mount2 Mount3 Mount4: library part "[Mount] M3 Mount Hole", "Place at least 4.5mm from board edge. Plated."
R1_A1 R1_A2 R1_A3 R1_A4 R1_A5 R1_A6 R1_A7 R1_A8 R1_A9 R1_A10 R1_A11 R1_A12 R1_A13 R1_A14 R2 R3 R7: "RMCF0603FT1K00", Resistance=1k, Size Package=0603, Supplier Part Number 1=RMCF0603FT1K00DKR-ND, Tolerance=1%, Supplier 1=DigiKey, Wattage=1/10W
R4 R5: "MCT06030C2709FP500", Resistance=27, Size Package=0603, Supplier Part Number 1=749-1631-1-ND, Tolerance=1%, Supplier 1=DigiKey, Wattage=1/10W
R6: "RR0816Q-330-D", Resistance=33, Size Package=0603, Supplier Part Number 1=RR08Q33DDKR-ND, Tolerance=0.5%, Supplier 1=DigiKey, Wattage=1/16W
R8: "RC0603FR-07158KL", Resistance=158k, Size Package=0603, Supplier Part Number 1=311-158KHRDKR-ND, Tolerance=1%, Supplier 1=DigiKey, Wattage=1/10W
R9: "RC0603FR-0730K1L", Resistance=30.1k, Size Package=0603, Supplier Part Number 1=311-30.1KHRCT-ND, Tolerance=1%, Supplier 1=DigiKey, Wattage=1/10W
R10: "CR0603-FX-1501ELF", Resistance=1.5k, Size Package=0603, Supplier Part Number 1=118-CR0603-FX-1501ELFCT-ND, Tolerance=1%, Supplier 1=DigiKey, Wattage=1/10W
R11: "RK73B1JTTD221J", Resistance=220, Size Package=0603, Supplier Part Number 1=2019-RK73B1JTTD221JDKR-ND, Tolerance=5%, Supplier 1=DigiKey, Wattage=1/8W
R12 R15: "RC0603JR-1310RL", Resistance=10, Size Package=0603, Supplier Part Number 1=13-RC0603JR-1310RLDKR-ND, Tolerance=5%, Supplier 1=DigiKey, Wattage=1/10W
R13: "RC0603FR-07120RL", Resistance=120, Size Package=0603, Supplier Part Number 1=311-120HRDKR-ND, Tolerance=1%, Supplier 1=DigiKey, Wattage=1/10W
R14: "RMCF0603FT10K0", Resistance=10k, Size Package=0603, Supplier Part Number 1=RMCF0603FT10K0DKR-ND, Tolerance=1%, Supplier 1=DigiKey, Wattage=1/10W
S1_A1 S1_A2 S1_A3 S1_A4 S1_A5 S1_A6 S1_A7 S1_A8 S1_A9 S1_A10 S1_A11 S1_A12 S1_A13 S1_A14: "Custom part"
S2 S3: "PTS815SJM250SMTRLFS", Supplier Part Number 1=CKN12215-6-ND, Supplier 1=DigiKey
U1: library part "[MCU] RP2350A", "QFN-60 Package", Supplier Part Number 1=2648-SC1509-A4CT-ND, Supplier 1=DigiKey
U2: "THVD1400DR", Supplier Part Number 1=296-THVD1400DRCT-ND, Supplier 1=DigiKey
V1: library part "[Switching] SMD 0.8-31V 3A", "AP63301WU-7", Supplier Part Number 1=31-AP63301WU-7CT-ND, Supplier 1=DigiKey
V2: library part "[Linear] SMD 3V3 1.5A", "AP7362A-33SP-13", Supplier Part Number 1=AP7362A-33SP-13DICT-ND, Supplier 1=DigiKey
X1: "0353620450", Supplier Part Number 1=WM18922-ND, Supplier 1=DigiKey
X2: library part "[Pogo] Magnetic Right-Angle 4pos Male", "5358", Supplier Part Number 1=1528-5358-ND, Supplier 1=DigiKey
X3: library part "[Pogo] Magnetic Right-Angle 4pos Female", "5358", Supplier Part Number 1=1528-5358-ND, Supplier 1=DigiKey
Y1: library part "[Crystal] SMD 12MHz", "815-ABM8-272-T3", Supplier Part Number 1=535-ABM8-272-T3CT-ND, Supplier 1=DigiKey

## Nets (pads, with @x,y where several pads share a name; then routed paths per layer and width w, separated by ;. In a path a pad name is that pad's centre, name@x,y a point inside that pad or via, vN(x,y) a via of type N, cw(c..) or ccw(c..) an arc to the next point about the centre after c; other vN are vias at no path point)
+1V1: C12.2 C13.2 C14.2 C15.1 L1.1 U1.6 U1.23 U1.39 U1.50
+3V3: C3.2 C4.2 C5.2 C6.2 C7.2 C8.2 C9.2 C10.2 C11.1 C16.2 C17.2 C25.2 D3.1 D4.1 M1.8 R1_A1.2 R1_A2.2 R1_A3.2 R1_A4.2 R1_A5.2 R1_A6.2 R1_A7.2 R1_A8.2 R1_A9.2 R1_A10.2 R1_A11.2 R1_A12.2 R1_A13.2 R1_A14.2 R6.1 R11.2 U1.1 U1.11 U1.20 U1.30 U1.38 U1.44 U1.45 U1.49 U1.53 U1.54 U2.8
+5V: C20.2 C21.2 C22.2 C26_A1.1 C26_A2.1 C26_A3.1 C26_A4.1 C26_A5.1 C26_A6.1 C26_A7.1 C26_A8.1 C26_A9.1 C26_A10.1 C26_A11.1 C26_A12.1 C26_A13.1 C26_A14.1 D2.1 D8.2 L3.2 L4_A1.1 L4_A2.1 L4_A3.1 L4_A4.1 L4_A5.1 L4_A6.1 L4_A7.1 L4_A8.1 L4_A9.1 L4_A10.1 L4_A11.1 L4_A12.1 L4_A13.1 L4_A14.1 R8.2
"+5V Reg BST": C18.2 V1.6
"+5V Reg FB": C20.1 R8.1 R9.2 V1.1
"+5V Reg SW": C18.1 L3.1 V1.5
+5V-ORed: C23.2 D7.1 D8.1 D9.1 V2.2 V2.3 V2.4
+5V_USB: D7.2 X1.1
+24V: C19.2 D1.2 R10.2 V1.2 V1.3 X2.4 X3.4
GND: C1.1 C2.1 C3.1 C4.1 C5.1 C6.1 C7.1 C8.1 C9.1 C10.1 C11.2 C12.1 C13.1 C14.1 C15.2 C16.1 C17.1 C19.1 C21.1 C22.1 C23.1 C24.1 C25.1 C26_A1.2 C26_A2.2 C26_A3.2 C26_A4.2 C26_A5.2 C26_A6.2 C26_A7.2 C26_A8.2 C26_A9.2 C26_A10.2 C26_A11.2 C26_A12.2 C26_A13.2 C26_A14.2 D1.1 D2.2 D3.2 D5.2 D6.2 D9.2 D10.3 L4_A1.3 L4_A2.3 L4_A3.3 L4_A4.3 L4_A5.3 L4_A6.3 L4_A7.3 L4_A8.3 L4_A9.3 L4_A10.3 L4_A11.3 L4_A12.3 L4_A13.3 L4_A14.3 M1.4 Mount1.1 Mount2.1 Mount3.1 Mount4.1 R3.1 R9.1 R14.1 S1_A1.3 S1_A1.MH S1_A2.3 S1_A2.MH S1_A3.3 S1_A3.MH S1_A4.3 S1_A4.MH S1_A5.3 S1_A5.MH S1_A6.3 S1_A6.MH S1_A7.3 S1_A7.MH S1_A8.3 S1_A8.MH S1_A9.3 S1_A9.MH S1_A10.3 S1_A10.MH S1_A11.3 S1_A11.MH S1_A12.3 S1_A12.MH S1_A13.3 S1_A13.MH S1_A14.3 S1_A14.MH S3.2 U1.47 U1.61 U2.5 V1.4 V2.1 V2.9 X1.4 X2.1 X3.1 Y1.2 Y1.4
Neopixel_Data: L4_A1.4 U1.31
NetC2_2: C2.2 R2.1 Y1.3
NetC24_2: C24.2 D4.2 V2.5 V2.6 V2.7
NetD5_1: D5.1 R10.1
NetD6_1: D6.1 R11.1
NetL4_A1_2: L4_A1.2 L4_A2.4
NetL4_A2_2: L4_A2.2 L4_A3.4
NetL4_A3_2: L4_A3.2 L4_A4.4
NetL4_A4_2: L4_A4.2 L4_A5.4
NetL4_A5_2: L4_A5.2 L4_A6.4
NetL4_A6_2: L4_A6.2 L4_A7.4
NetL4_A7_2: L4_A7.2 L4_A8.4
NetL4_A8_2: L4_A8.2 L4_A9.4
NetL4_A9_2: L4_A9.2 L4_A10.4
NetL4_A10_2: L4_A10.2 L4_A11.4
NetL4_A11_2: L4_A11.2 L4_A12.4
NetL4_A12_2: L4_A12.2 L4_A13.4
NetL4_A13_2: L4_A13.2 L4_A14.4
NetL4_A14_2: L4_A14.2
NetR3_2: R3.2 S2.2
QSPI_SCLK: M1.6 U1.56
QSPI_SD0: M1.5 U1.57
QSPI_SD1: M1.2 U1.59
QSPI_SD2: M1.3 U1.58
QSPI_SD3: M1.7 U1.55
QSPI_SS: M1.1 R7.1 U1.60
RP2350_D_N: R5.1 X1.2
RP2350_D_P: R4.1 X1.3
RP2350_DX_N: R5.2 U1.51
RP2350_DX_P: R4.2 U1.52
RS485_EN: R14.2 U2.2 U2.3
RS485_N: D10.2 R13.1 R15.1 X2.2 X3.2
RS485_P: D10.1 R12.1 R13.2 X2.3 X3.3
RS485_RX: U1.32 U2.4
RS485_TX: U1.33 U2.1
RS485_X_N: R15.2 U2.7
RS485_X_P: R12.2 U2.6
RUN: S2.1 U1.26
SW1: R1_A1.1 S1_A1.1 U1.2
SW2: R1_A2.1 S1_A2.1 U1.3
SW3: R1_A3.1 S1_A3.1 U1.4
SW4: R1_A4.1 S1_A4.1 U1.5
SW5: R1_A5.1 S1_A5.1 U1.7
SW6: R1_A6.1 S1_A6.1 U1.8
SW7: R1_A7.1 S1_A7.1 U1.9
SW8: R1_A8.1 S1_A8.1 U1.10
SW9: R1_A9.1 S1_A9.1 U1.12
SW10: R1_A10.1 S1_A10.1 U1.13
SW11: R1_A11.1 S1_A11.1 U1.14
SW12: R1_A12.1 S1_A12.1 U1.15
SW13: R1_A13.1 S1_A13.1 U1.16
SW14: R1_A14.1 S1_A14.1 U1.17
U\S\B\_\B\O\O\T\: R7.2 S3.1
VREG_AVDD: R6.2 U1.46
VREG_LX: L1.2 U1.48
XIN: C1.2 U1.21 Y1.1
XOUT: R2.2 U1.22
pads on no net: S1_A1.2 S1_A2.2 S1_A3.2 S1_A4.2 S1_A5.2 S1_A6.2 S1_A7.2 S1_A8.2 S1_A9.2 S1_A10.2 S1_A11.2 S1_A12.2 S1_A13.2 S1_A14.2 U1.18 U1.19 U1.24 U1.25 U1.27 U1.28 U1.29 U1.34 U1.35 U1.36 U1.37 U1.40 U1.41 U1.42 U1.43 V2.8

## Keep-outs
Keep-Out Layer:
  the board outline again, w0.2

## Silkscreen, mask and mechanical layers (free items; w line width, h text height)
Top Overlay:
  text "USB" at 8.917,50.5 h1
  text "VUSB" at 13.95,47.35 h0.8
  text "D-" at 13.95,45.35 h0.8
  text "D+" at 13.95,43.35 h0.8
  text "GND" at 13.95,41.35 h0.8